# Altium PCB EVQ4242-VE-00B_layout.PcbDoc
Units mil, origin at the board's own origin, x right, y up, seen from the top; angles counter-clockwise.
Board outline 6000 x 4000 mil, 4 copper layers (Top Layer, Mid-Layer 1, Mid-Layer 2, Bottom Layer); 75 components, 28 nets, 229 pads, 356 vias.
Unrouted connection lines stored in the file: 22.
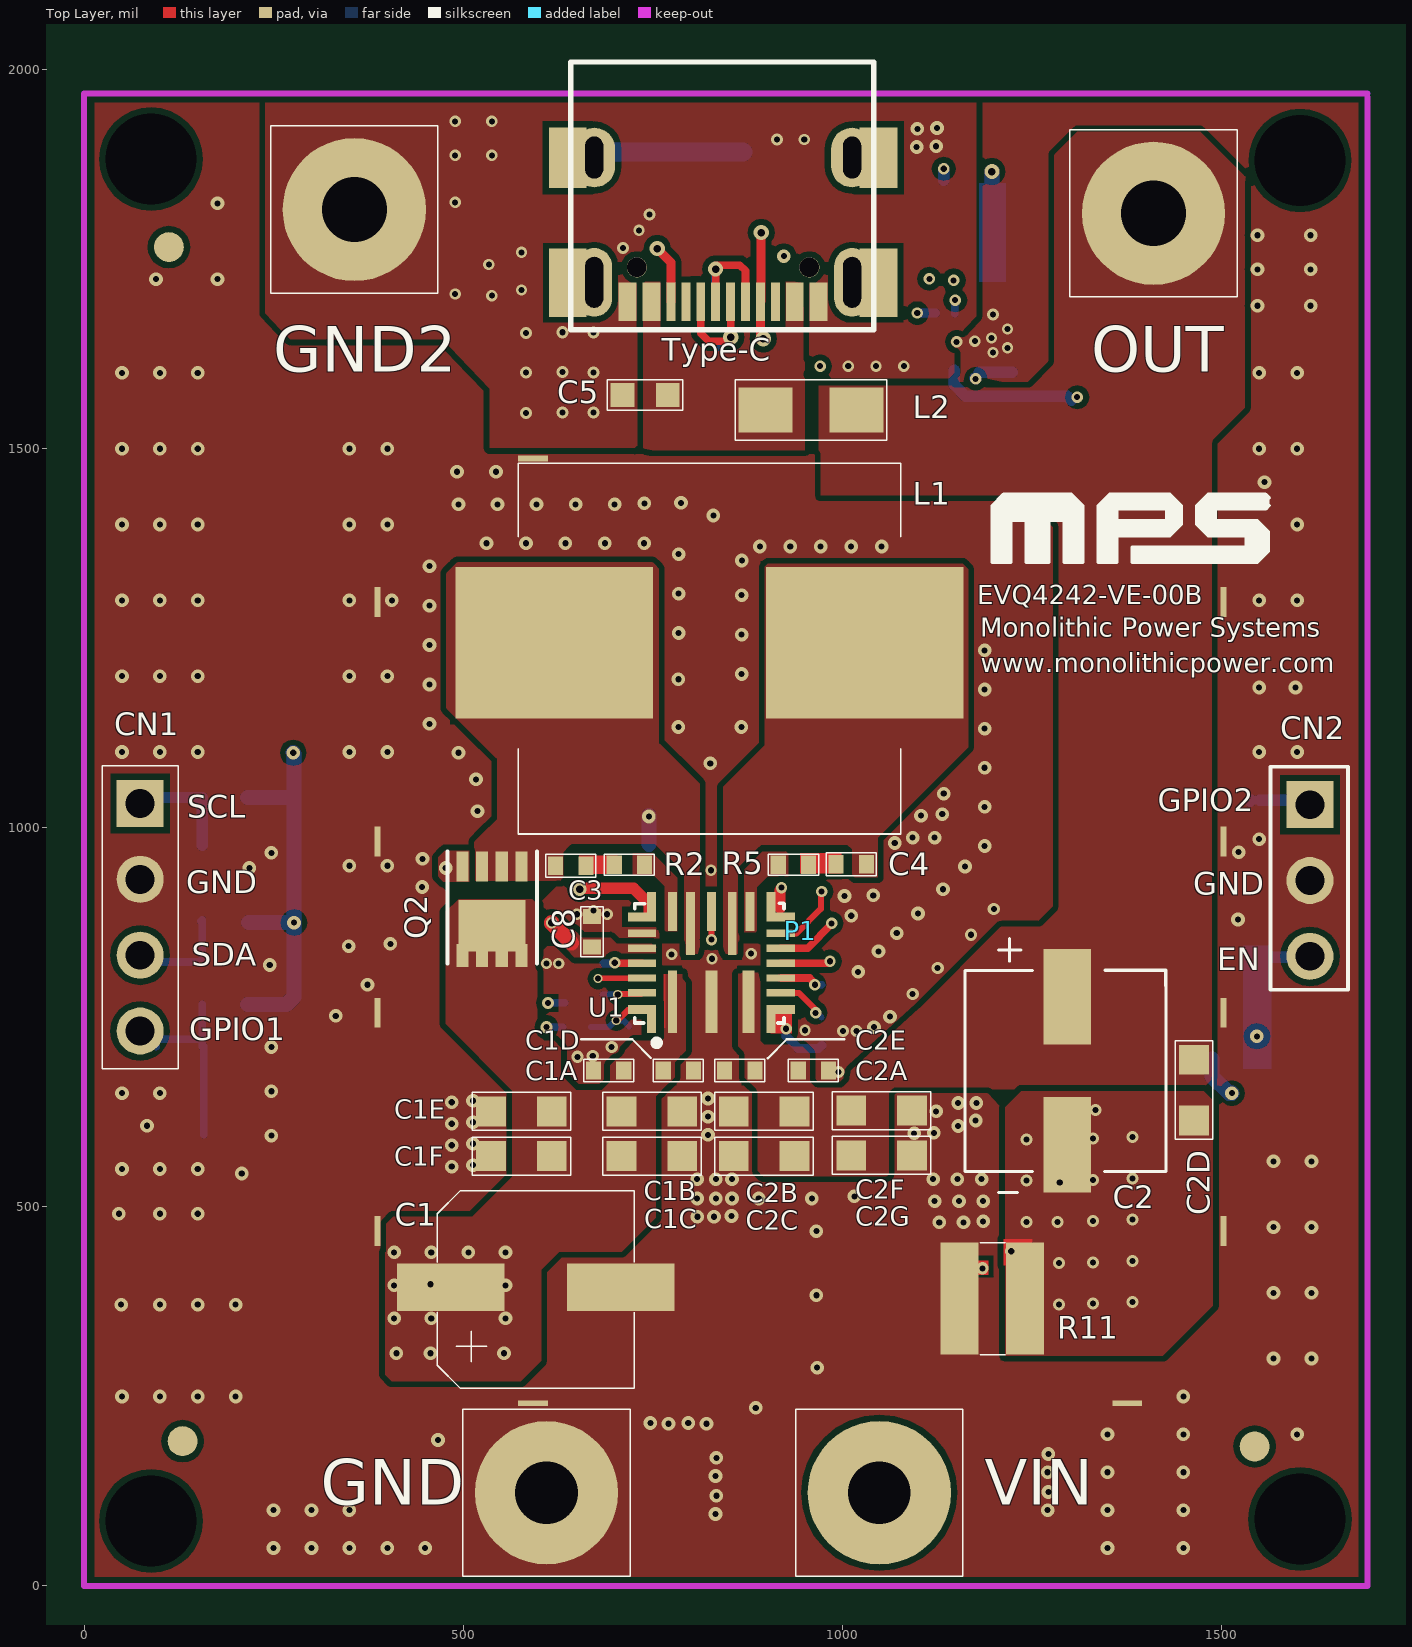
[diagram p0: Top Layer view]
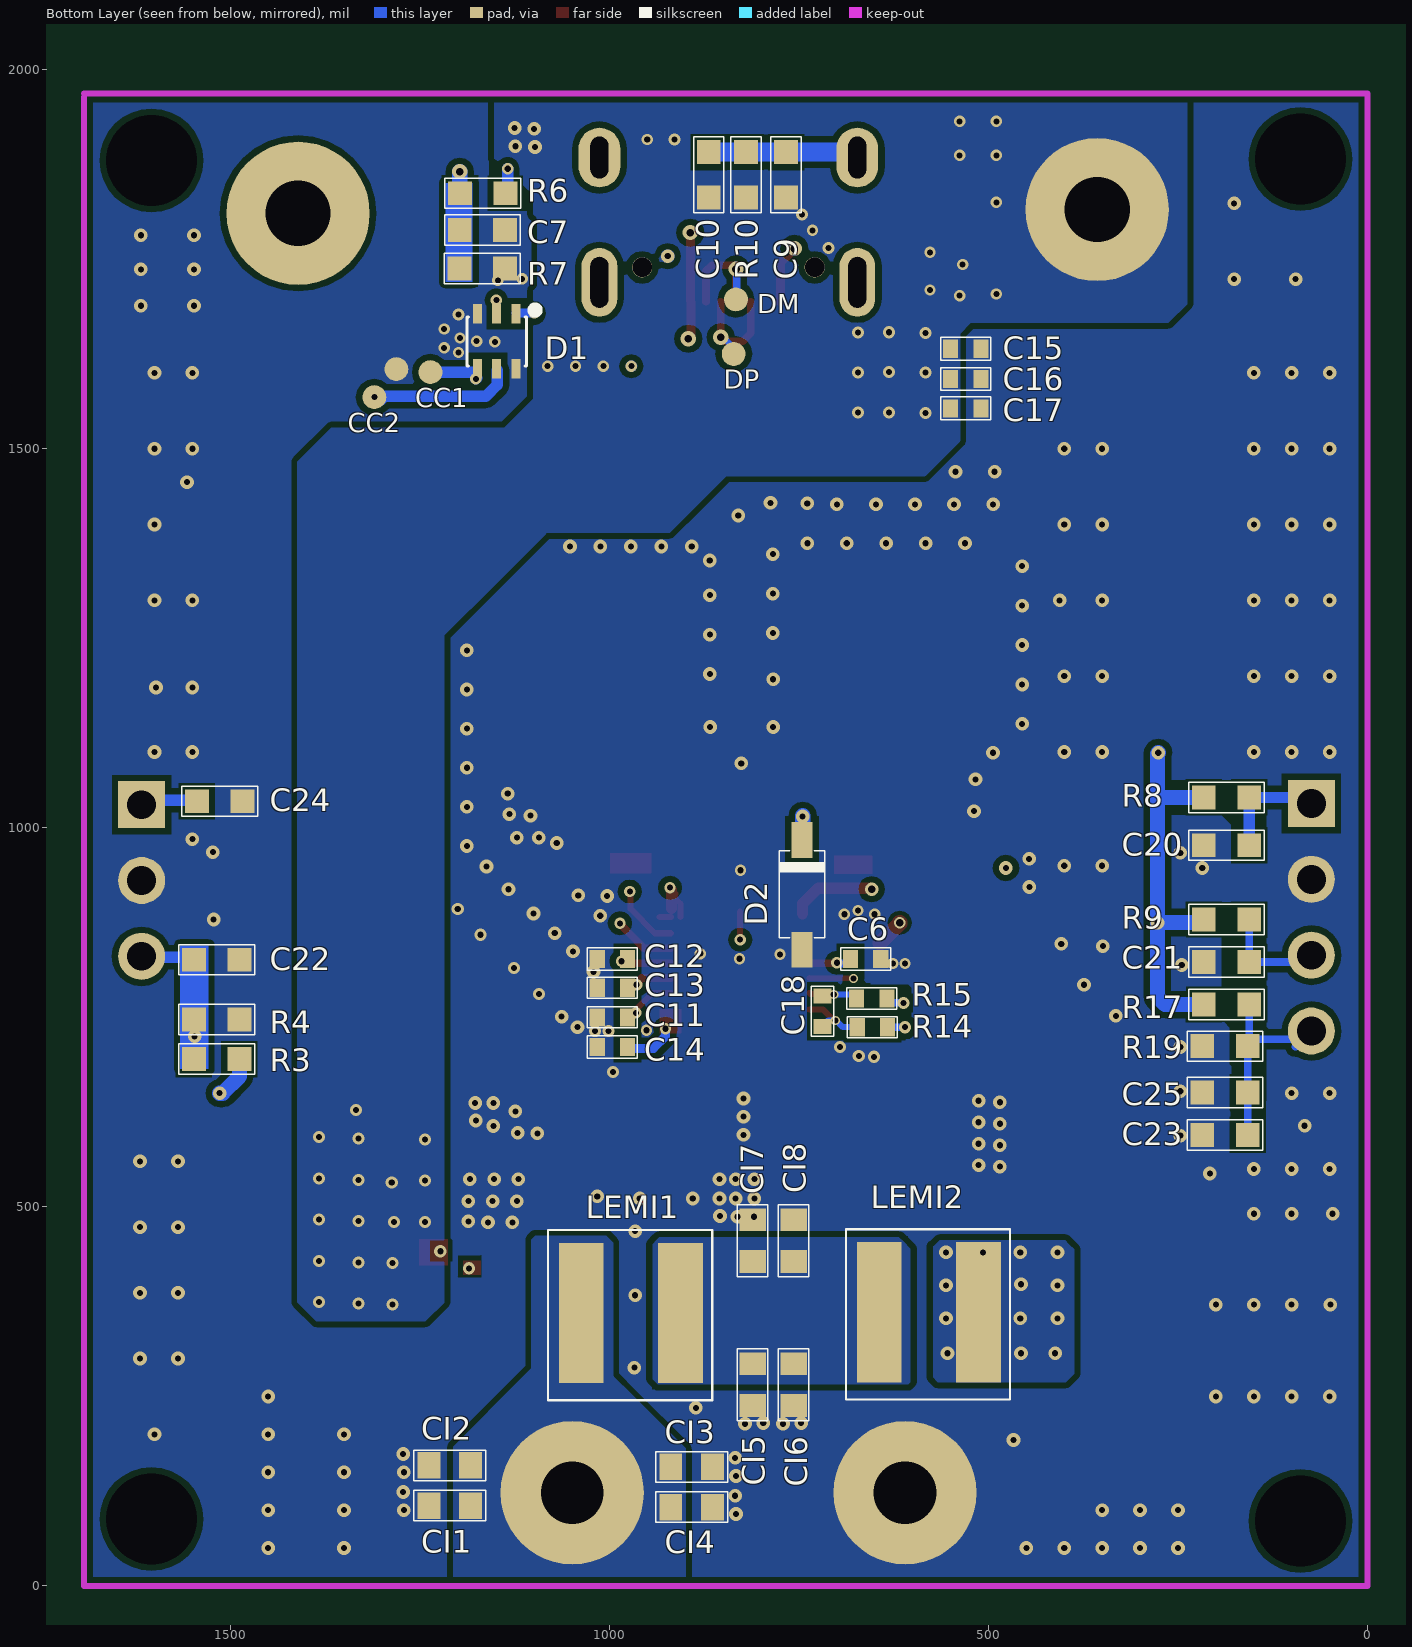
[diagram p1: Bottom Layer view, seen from below]
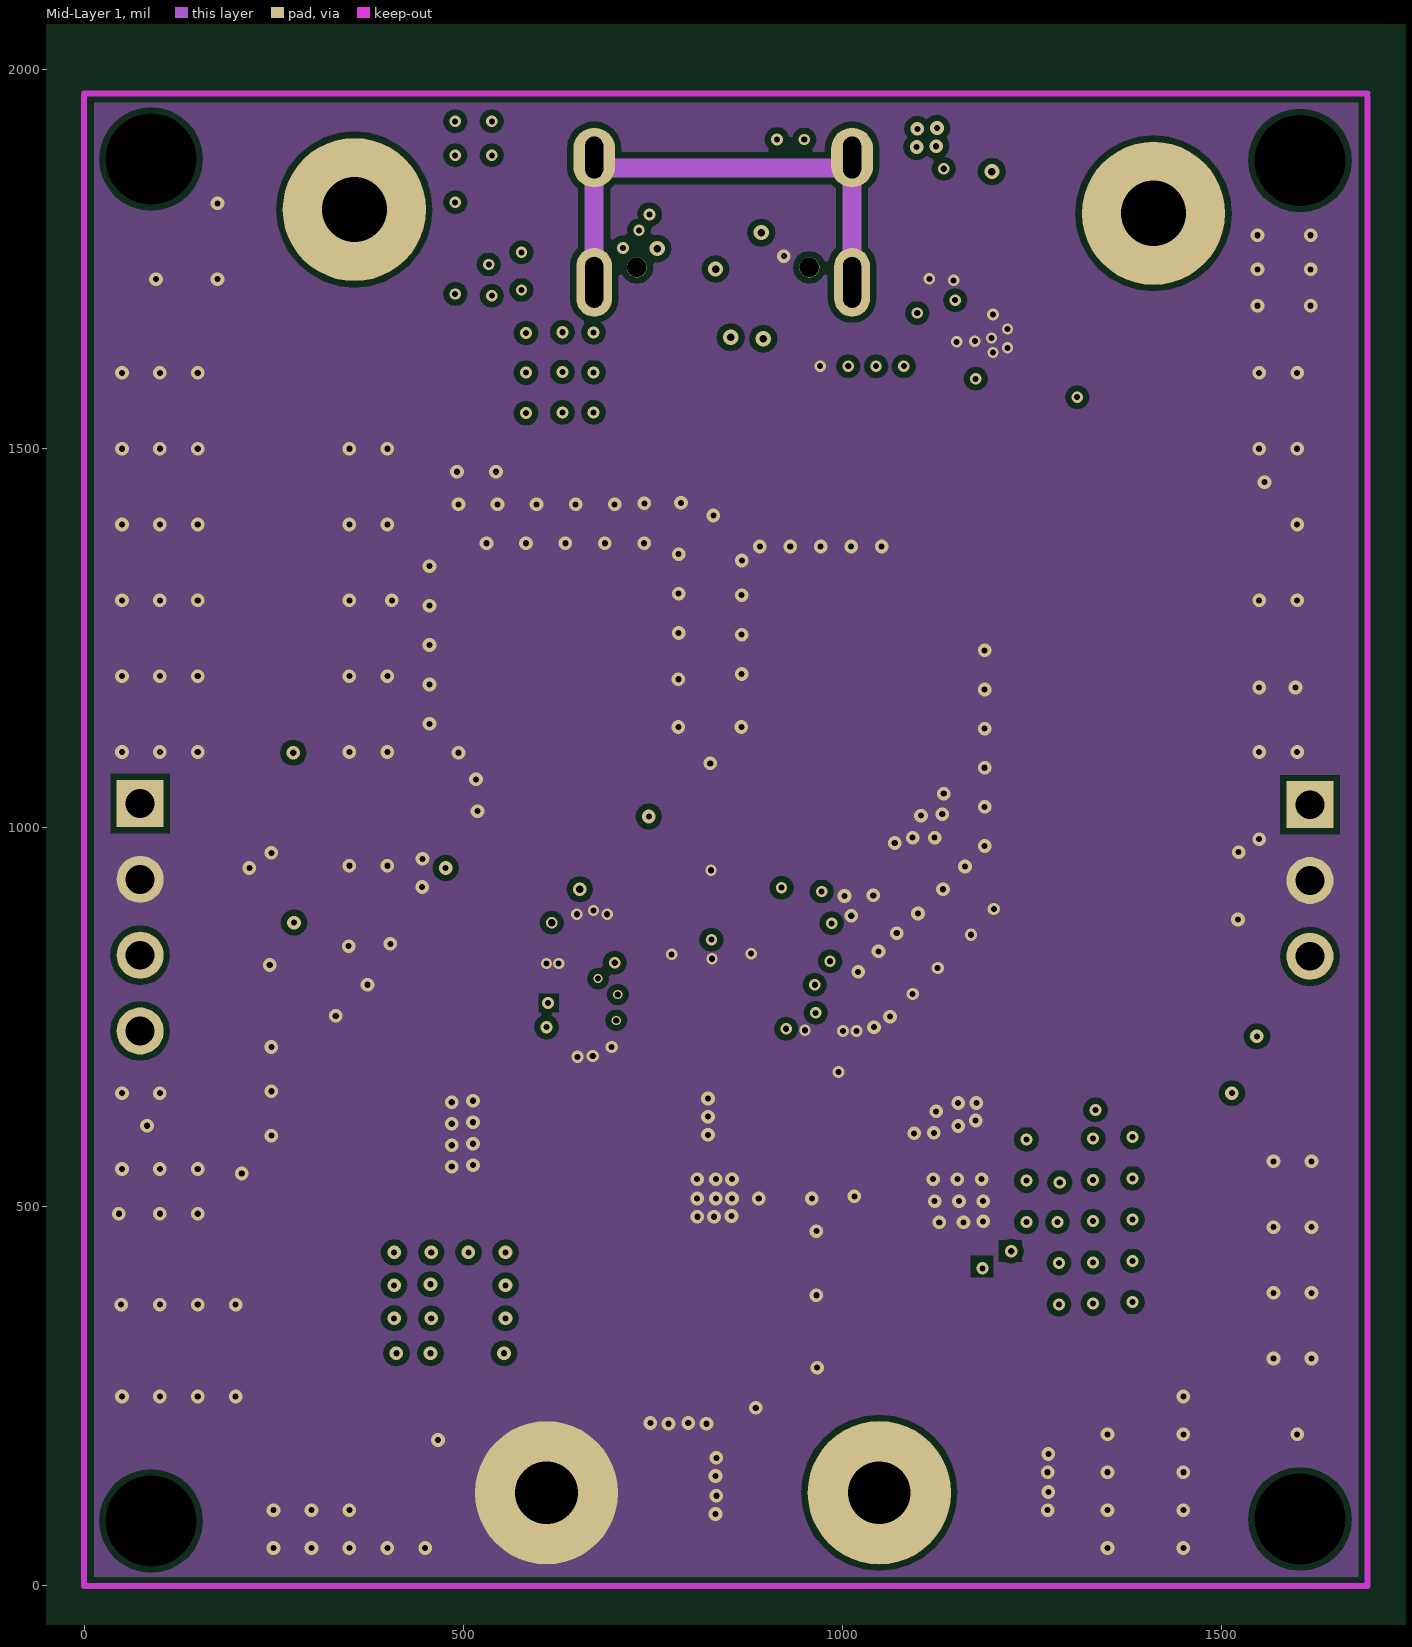
[diagram p2: Mid-Layer 1]
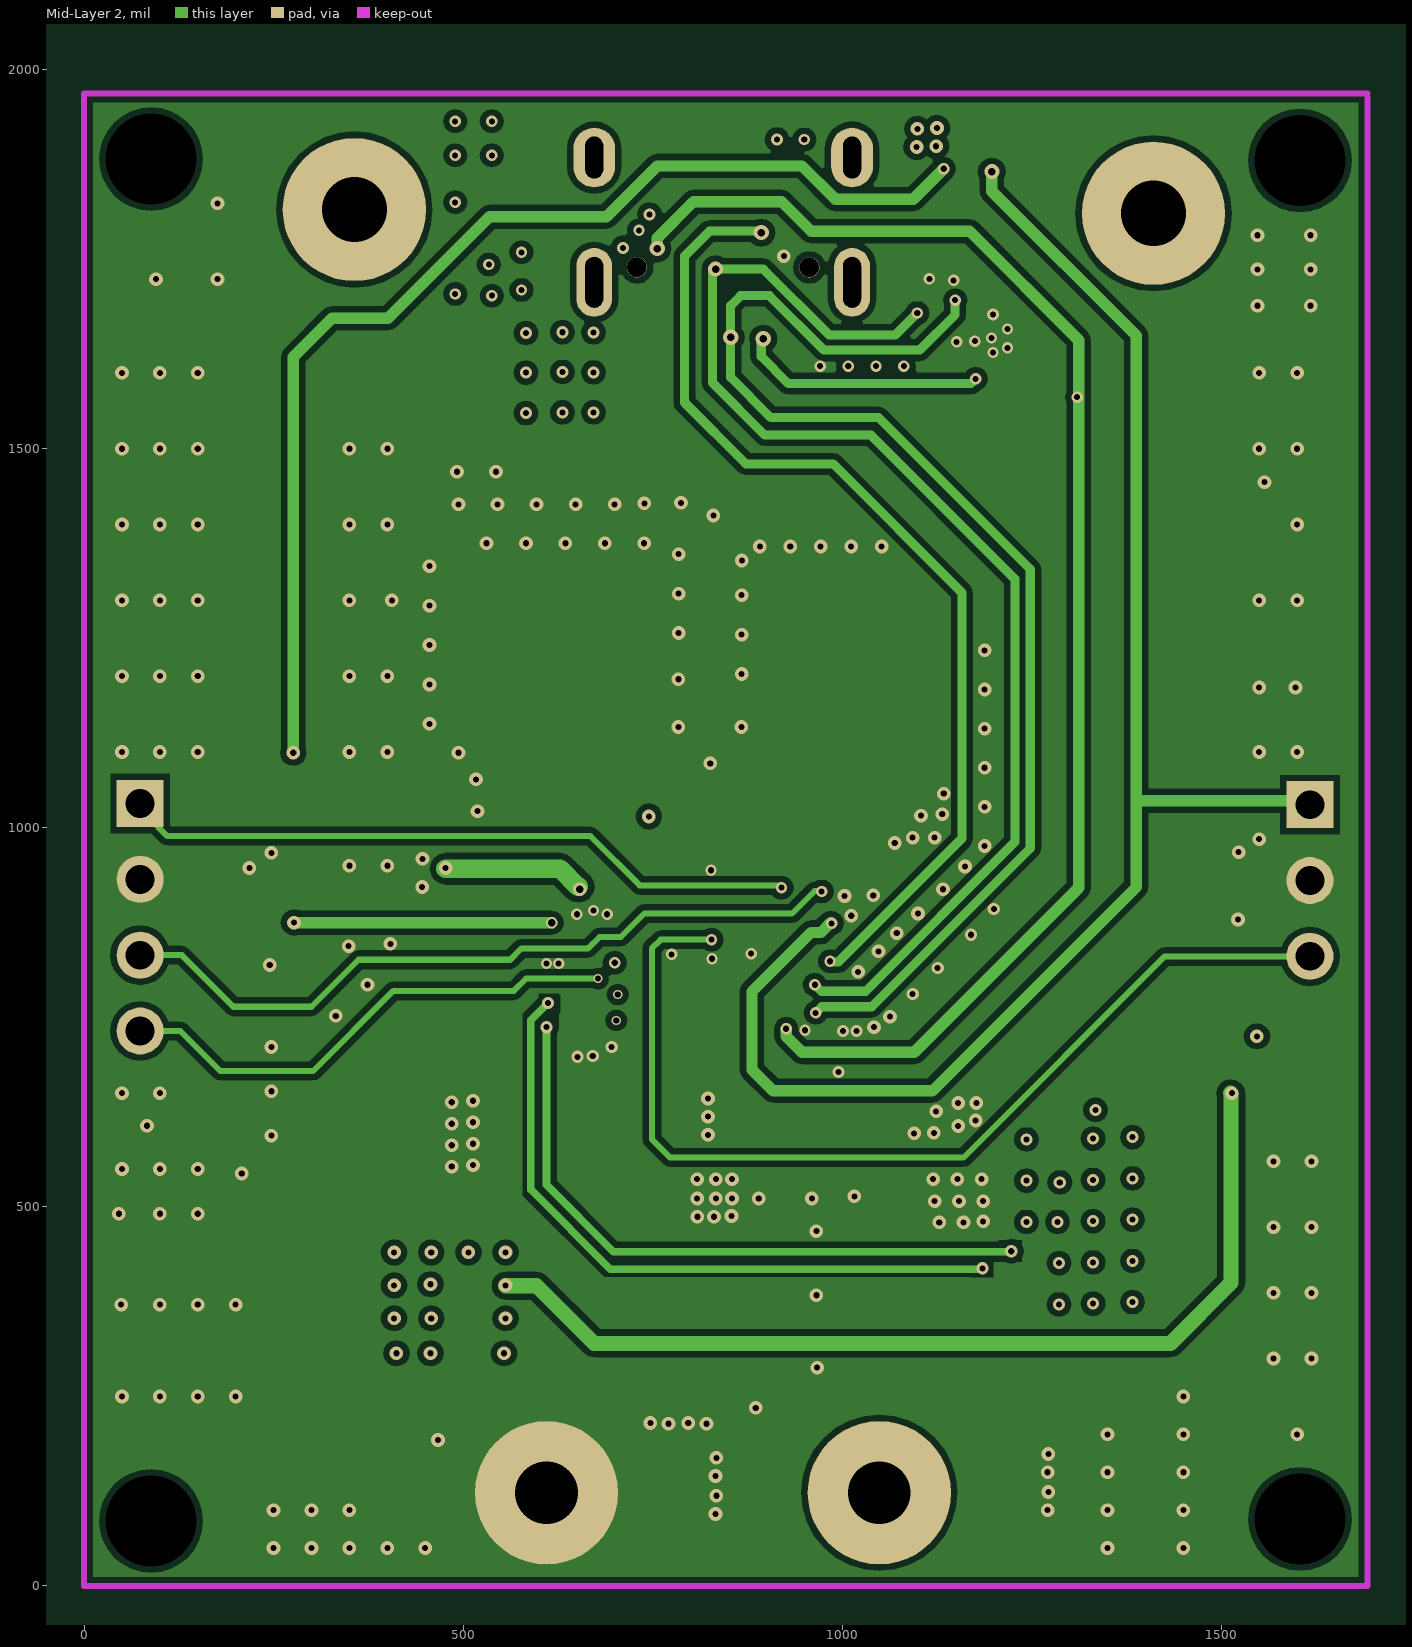
[diagram p3: Mid-Layer 2]

## Layer stack, top to bottom
Top Layer: signal copper 1.4
Dielectric: core 12.6, FR-4, Dk 4.8
Mid-Layer 1: signal copper 1.4
Dielectric: prepreg 12.6, FR-4, Dk 4.8
Mid-Layer 2: signal copper 1.4
Dielectric: core 12.6, FR-4, Dk 4.8
Bottom Layer: signal copper 1.4

## Board outline
-1522.15,-914.62 4477.85,-914.62 4477.85,3085.38 -1522.15,3085.38

## Design rules (kind name [scope] priority, off if disabled: settings)
Clearance [All] p1: gap=5
ComponentClearance [All] p1: gap=0 collisioncheckmode=3 verticalgap=0 showdistances=FALSE
DiffPairsRouting [InNet('DM')] p1: maxlimit=10 minlimit=10 mostfreqgap=10 maxuncoupledlength=500
HoleSize [All] p1: absolutevalues=TRUE maxlimit=200 minlimit=1 maxpercent=80.000 minpercent=20.000
HoleToHoleClearance [All] p1: gap=0 allowstackedmicrovias=TRUE
MinimumSolderMaskSliver [All] p1: minsoldermaskwidth=0
PlaneConnect [All] p1: planeconnectstyle=Direct reliefexpansion=20 reliefentries=4 reliefconductorwidth=10 reliefairgap=10
PolygonConnect [All] p1: connectstyle=Direct reliefconductorwidth=10 reliefentries=4 polygonreliefangle="90 Angle"
RoutingVias [All] p1: holewidth=28 width=50 viastyle="Through Hole" minholewidth=28 minwidth=50 maxholewidth=28 maxwidth=50
SilkToSilkClearance [All] p1: silktosilkclearance=0
SilkscreenOverComponentPads [All] p1: minsilkscreentomaskgap=0
SolderMaskExpansion [All] p1: expansion=4
Width [All] p1: maxlimit=40 minlimit=7 preferedwidth=10
20 further rules are at their usual default settings.

## Components (designator, comment, footprint, x,y, rotation, side; value= is the part's Value field where it differs from the comment)
C1 "CAP/ELECT/DIP/OD5.3P2.0" CAP/ELECT/SMD/C6 484,394 r270 top
C1A "CAP\0603" CAP/0402#1 662,675 r0 top
C1B "CAP\0603" CAP/0805 789,626 r180 top
C1C "" CAP/0805 789,567 r180 top
C1D "CAP\0603" CAP/0402#1 814,685 r180 top
C1E "CAP\0603" CAP/0805 537,626 r0 top
C1F "" CAP/0805 537,567 r0 top
C2 "CAP/ELECT/DIP/OD5.3P2.0" 6.6mm*6.6mm 1292,682 r90 top
C2A "CAP\0603" CAP/0402#1 932,675 r0 top
C2B "CAP\0603" CAP/0805 937,626 r180 top
C2C "CAP\0603" CAP/0805 937,567 r180 top
C2D "CAP\0603" CAP/0805 1464,694 r270 top
C2E "CAP\0603" CAP/0402#1 895,685 r180 top
C2F "CAP\0603" CAP/0805 1012,627 r0 top
C2G "CAP\0603" CAP/0805 1012,568 r0 top
C3 "CAP\0603" CAP/0402#1 612,945 r0 top
C4 "CAP\0603" CAP/0402#1 1042,957 r180 top
C5 "CAP\0603" CAP/0603#1 772,1569 r180 top
C6 "CAP\0603" CAP/0402#1 632,832 r0 bottom
C7 "CAP\0603" CAP/0603#1 1135.4,1786.45 r0 bottom
C8 "CAP\0603" CAP/0402#1 675,833 r90 top
C9 "CAP\0603" CAP/0603#1 764.97,1893.28 r270 bottom
C10 "CAP\0603" CAP/0603#1 866.97,1893.28 r270 bottom
C11 "CAP\0603" CAP/0402#2 1015.98,750 r180 bottom
C12 "CAP\0603" CAP/0402#1 966,832 r0 bottom
C13 "CAP\0603" CAP/0402#2 1015.98,789 r180 bottom
C14 "CAP\0603" CAP/0402#1 966,716 r0 bottom
C15 "Cap" CAP/0402#1 500,1637 r0 bottom
C16 "Cap" CAP/0402#1 500,1596.84 r0 bottom
C17 "Cap" CAP/0402#1 500,1558.26 r0 bottom
C18 "CAP\0603" CAP/0402#1 714,728 r90 bottom
C20 "33pF" CAP0603#1 243,1014 r180 bottom
C21 "33pF" CAP0603#1 243,860 r180 bottom
C22 "33pF" CAP0603#1 1461,789 r0 bottom
C23 "33pF" CAP0603#1 245,632 r180 bottom
C24 "33pF" CAP0603#1 1457,998 r0 bottom
C25 "CAP\0603" CAP/0603#2 236,670 r180 bottom
CI1 "CAP0603" CAP0603#2 1238,106 r180 bottom
CI2 "CAP0603" CAP0603#2 1238,159 r180 bottom
CI3 "CAP0603" CAP0603#2 864,157 r0 bottom
CI4 "CAP0603" CAP0603#2 864,104 r0 bottom
CI5 "CAP0603" CAP0603#2 811,238 r90 bottom
CI6 "CAP0603" CAP0603#2 757,238 r90 bottom
CI7 "CAP0603" CAP0603#2 811,483 r270 bottom
CI8 "CAP0603" CAP0603#2 757,483 r270 bottom
CN1 "HEADER 4" "HEADER 1X4" 109,1022 r270 top
CN2 "AC" CONN/3PIN/2.54MM 1612,1036.5 r270 top
D1 "ESD1L001" ESD0001 1123,1673 r270 bottom
D2 "NS" SOD123 744,880 r90 bottom
GND "CONN/1MM" TP/2MM#1 610,123 r0 top
GND2 "CONN/TP" TP/2MM#2 362,1814 r0 top
L1 "COILCRAFT/LPO2506IB-682" 7443551470 564,1281 r0 top
L2 "L-10X10" sm1206 1019,1551 r180 top
LEMI1 "TDK-2520" L5030 1037,360 r180 bottom
LEMI2 "TDK-2520" L5030 644,361 r180 bottom
OUT "CONN/TP" TP/2MM#2 1416,1809 r0 top
P1 "SHELD" SHELD 627,673 r0 top
Q2 "SQS484EN" SQS484EN 499,949 r270 top
R2 "RES/DIP/1/2W" RES0402 739.4,951.36 r180 top
R3 "RES/DIP/1/2W" RES0603 1387,680 r0 bottom
R4 "RES/DIP/1/2W" RES0603 1387,732 r0 bottom
R5 "RES/DIP/1/2W" RES0402 915.78,951.36 r0 top
R6 "RES/DIP/1/2W" RES0603 1036,1822 r0 bottom
R7 "RES/DIP/1/2W" RES0603 1036.58,1722.67 r0 bottom
R8 "RES/DIP/1/2W" RES0603 55,1025 r0 bottom
R9 "RES/DIP/1/2W" RES0603 55,864 r0 bottom
R10 "RES/DIP/1/2W" RES0603 834.97,1730.28 r90 bottom
R11 "RES/DIP/1/2W" l1508 1198,379 r180 top
R14 "RES/DIP/1/2W" RES0402 633,737 r0 bottom
R15 "RES/DIP/1/2W" RES0402 674,775 r180 bottom
R17 "RES/DIP/1/2W" RES0603 317,782 r180 bottom
R19 "RES/DIP/1/2W" RES0603 319,727 r180 bottom
Type-C "New Type_c" "New Type-C" 833,1789 r180 top locked
U1 "MPQ4242" "QFN-22 (4MM×5MM)" 776.27,770.41 r90 top
VIN "CONN/2MM" TP/2MM#1 1049,123 r0 top

## Footprints (in the part's own frame and the unit in brackets; to place one, negate y for a bottom-side part, rotate by r counter-clockwise, add the part's x,y. Pads: shape width x height; smd on the part's side, far side on the other; paste and mask are expansions set on the pad)
6.6mm*6.6mm [mm] "SMT polymer cap, 150uF, 20V, chemi-con"
  rect 3.2x1.6 smd: 1(2.413,-0.127) 2(-2.54,-0.127)
  silkscreen extent -4.14,-3.43 4.37,3.3
7443551470 [mil]
  rect 260.2x200 smd: 1(56.28,-37) 2(465.72,-37)
  silkscreen extent 9,-289 513,200
CAP0603#1 [mil]
  rect 31.5x31.5 smd: 1(27,-37) 2(87,-37)
  silkscreen extent 7,-57 107,-17
CAP0603#2 [mil]
  rect 30x35 smd paste-2 mask+0: 1(0,0) 2(55,0)
  silkscreen extent -20,-20 75,20, body extent -2,-15 58,15, height 20
CAP/0402#1 [mil]
  rect 20x24 smd: 1(10,5) 2(50,5)
  silkscreen extent -3,-10 63,20
CAP/0402#2 [mil]
  rect 20x24 smd paste+0 mask+3: 1(0,0) 2(40,0)
  silkscreen extent -13,-14 53,14
CAP/0603#1 [mil]
  rect 31.5x31.5 smd: 1(2,-2) 2(62,-2)
  silkscreen extent -18,-22 82,18
CAP/0603#2 [mil]
  rect 31.5x31.5 smd: 1(78,-19) 2(18,-19)
  silkscreen extent -2,-39 98,1
CAP/0805 [mm]
  rect 1x1 smd: 1(0,0) 2(2.032,0)
  silkscreen extent -0.64,-0.63 2.67,0.64
CAP/ELECT/SMD/C6 [mm]
  rect 1.6x3.6 smd: 1(0,0) 2(0,5.69)
  silkscreen extent -3.23,-0.46 3.38,6.15
CONN/3PIN/2.54MM [mil]
  rect 62x62 hole 38: 1(6,5)
  round 62 hole 38: 2(106,5) 3(206,5)
  silkscreen extent -44,-47 250,55
ESD0001 [mm]
  rect 0.66x0.3 smd paste+0.05 mask+0.05: 1(-0.127,0) 2(-0.127,-0.65) 3(-0.127,-1.3) 4(1.713,-1.3) 5(1.713,-0.65) 6(1.713,0)
  silkscreen extent -0.38,-1.65 1.63,0.76
"HEADER 1X4" [mil]
  rect 62x62 hole 38: 1(-10,-35)
  round 62 hole 38: 2(90,-35) 3(190,-35) 4(290,-35)
  silkscreen extent -60,-85 340,15
l1508 [mm]
  rect 1.27x3.75 smd: 1(1.1,0) 2(-1.1,0)
  silkscreen extent -0.43,-1.88 0.41,1.88
L5030 [mm]
  rect 1.5x4.7 smd mask+0.051: 1(0,0) 2(3.327,0)
  silkscreen extent -1.12,-2.92 4.38,2.78
"New Type-C" [mm]
  rect 1.27x2.286 smd mask+0.051: 0(-5.461,1.778) 0(4.953,1.778)
  rect 1.27x2.032 smd mask+0.051: 0(-5.461,-2.413) 0(4.953,-2.413)
  oval 1.4x2 hole 0.6 slot 1.4 at 90 deg mask+0: 0(-4.574,-2.415) 0(4.066,-2.415)
  oval 1.2x2.3 hole 0.6 slot 1.7 at 90 deg mask+0: 0(-4.574,1.765) 0(4.066,1.765)
  round 0.67 hole 0.65 mask+0: 1(-3.144,1.265) 1(2.636,1.265)
  rect 0.3x1.3 smd mask+0.025: A1(-3.604,2.415) A4(-2.804,2.415) A5(-1.504,2.415) A6(-0.504,2.415) A7(-0.004,2.415) A8(0.996,2.415) A9(2.296,2.415) A12(3.096,2.415) B1(2.796,2.415) B4(1.996,2.415) B5(1.496,2.415) B6(0.496,2.415) B7(-1.004,2.415) B8(-2.004,2.415) B9(-2.504,2.415) B12(-3.304,2.415)
  silkscreen extent -5.3,-5.62 4.86,3.36
"QFN-22 (4MM×5MM)" [mm]
  rect 2.1x0.3 smd mask+0.102: 1(0,0)
  rect 2.1x0.4 smd: 2(0,-1.3) 3(0,-2.55)
  rect 0.95x0.3 smd: 4(-0.575,-3.3) 10(3.2,-3.3) 16(3.2,0.7) 22(-0.575,0.7)
  rect 0.3x0.95 smd: 4(-0.25,-3.625) 10(2.85,-3.625) 16(2.85,1.025) 22(-0.25,1.025)
  rect 0.25x0.95 smd: 5(0.3,-3.625) 6(0.8,-3.625) 7(1.3,-3.625) 8(1.8,-3.625) 9(2.3,-3.625) 17(2.3,1.025) 18(1.8,1.025) 19(1.3,1.025) 20(0.8,1.025) 21(0.3,1.025)
  rect 1.3x0.3 smd: 11(3.025,-2.6) 13(3.025,-1.3) 15(3.025,0)
  rect 2.1x0.3 smd: 12(2.625,-2) 14(2.625,-0.6)
  silkscreen extent -1.45,-3.73 3.3,1.27
RES0402 [mil]
  rect 20x24 smd paste-1000: 1(0,0) 2(40,0)
  silkscreen extent -13,-14 53,14
RES0603 [mil]
  rect 31.5x31.5 smd: 1(161,-15) 2(101,-15)
  silkscreen extent 81,-35 181,5
SHELD [mm]
  rect 0.2x1 smd mask+0.025: 1(-6.096,15.875) 2(-6.096,7.849) 3(-6.096,2.108) 4(-6.096,-5.207) 7(22.25,-5.207) 8(22.25,2.108) 9(22.25,7.849) 10(22.25,15.875)
  rect 1x0.2 smd mask+0.025: 5(-0.889,-10.973) 6(19.025,-10.973) 11(-0.889,20.676)
sm1206 [mm]
  rect 1.8x1.5 smd paste-25.4: 1(0,0) 2(3.048,0)
  silkscreen extent -1.02,-1.02 4.06,1.02
SOD123 [mil]
  rect 47x28 smd paste-1000: 1(-41,2) 2(104,2)
  silkscreen extent -25,-28 90,32
SQS484EN [mm] "N-MOSFET"
  rect 1.725x2.235 smd: 0(1.993,0.992)
  rect 0.99x0.405 smd: 1(0,1.98) 2(0,1.32) 3(0,0.66) 4(0,0)
  rect 0.76x0.405 smd: 5(2.985,0) 6(2.985,0.66) 7(2.985,1.32) 8(2.985,1.98)
  silkscreen extent -0.5,-0.5 3.25,2.5
TP/2MM#1 [mm]
  round 4.8 hole 2.1: 1(0,0)
  silkscreen extent -2.8,-2.8 2.8,2.8
TP/2MM#2 [mm]
  round 4.8 hole 2.184: 1(-0.137,0.038)
  silkscreen extent -2.94,-2.76 2.66,2.84

## Part data
C1 C2: library part 07.0271, "Electrolytic Capacitor;50V;Electrolytic;DIP"
C1A C1B C1D C1E C2A C2B C2C C2D C2E C2F C2G C3 C4 C5 C6 C7 C8 C12 C14 C18 C25: library part CAP0603, "CAP0603"
C1C C1F: library part CAP1210, "CAP1210"
C9 C10: library part CAP0603, "Ceramic Cap.,50V,X7R"
C11 C13: library part CAP0603, "Ceramic Cap.,50V,C0G"
C15 C16 C17: "Capacitor"
C20 C21 C22 C23 C24: library part CAP0402, "{Description}"
CI1 CI2 CI3 CI4 CI5 CI6 CI7 CI8 GND2 L2 OUT VIN: "{Description}"
D1: "ESD Diode"
D2: library part "D Schottky", "Schottky Diode"
GND: library part CONN/2MM, "{Description}"
L1: library part TOKO106C, "TOKO106C"
LEMI1 LEMI2: "Inductor, 1.45A, D62LCB"
Q2: library part AM4392N, "AM4392N"
U1: library part "QFN-22 (4MM*5MM)", "Buck-boost converter"

## Free pads (board coordinates)
  round 98.43 hole 120: 0(88.5,85.83) 0(88.5,1881.98)
  round 31.5 smd far side mask+2: 0(833,1697) 1(836,1625) 2(1236,1601) 3(1310,1568)
  round 31.5 smd far side mask+1: 0(1281,1605)
  round 118.11 hole 120: 0(1603.94,88.19) 0(1603.94,1880.31)
  round 39.37 smd mask+2: 1(112,1766) 2(130,191) 3(1544,184)

## Via types
v1: diameter 18, hole 8, Top Layer to Bottom Layer, tented both sides, 252 vias
v2: diameter 15, hole 8, Top Layer to Bottom Layer, tented both sides, 48 vias
v3: diameter 16, hole 8, Top Layer to Bottom Layer, tented both sides, 45 vias
v4: diameter 20, hole 10, Top Layer to Bottom Layer, tented both sides, 6 vias
v5: diameter 12, hole 8, Top Layer to Bottom Layer, tented both sides, 3 vias
v6: diameter 18, hole 10, Top Layer to Bottom Layer, tented both sides, 1 vias
v7: diameter 15, hole 10, Top Layer to Bottom Layer, tented both sides, 1 vias

## Nets (pads, with @x,y where several pads share a name; then routed paths per layer and width w, separated by ;. In a path a pad name is that pad's centre, name@x,y a point inside that pad or via, vN(x,y) a via of type N, cw(c..) or ccw(c..) an arc to the next point about the centre after c; other vN are vias at no path point)
BST1: R2.1 U1.15
BST2: R5.1 U1.11
CC1: C12.1 D1.4 pad.2@1236,1601 Type-C.A5 U1.7 | length 1922.1
  Top Layer w10: U1.7 v2@983.25,821.59
  Top Layer w12: v4(893.21,1785) 892.99,1784.78 892.99,1694.7 Type-C.A5 892.21,1649.79 v4@899,1643
  Mid-Layer 2 w12: v4@893.21,1645 893.21,1621.79 929,1586 1169.86,1586 v2(1175.98,1592.13) ; v4@894,1787 825,1787 792,1754 792,1561 873,1480 988,1480 1158,1310 1158,986 995,823 v2@984,823
  Bottom Layer w15: D1.4@1174.8,1593.31 v2(1175.98,1592.13) ; 1181,1601 pad.2@1224.41,1601
  other v2: 984,824
  other v4: 896,1645
CC2: C14.1 D1.5 pad.3@1310,1568 Type-C.B5 U1.4 | length 2207
  Top Layer w12: v4(756,1764) 774.1,1745.9 Type-C.B5
  Mid-Layer 2 w15: v4(756,1764) 756,1778 804,1826 920,1826 959,1787 1168,1787 1312,1643 1312,921 1095,704 947,704 926,725 v2(926,735)
  Bottom Layer w12: v2(926,735) 926,725 942,709 969,709 C14.1@973,713
  Bottom Layer w15: D1.5@1148,1603.56 1148,1584 1163,1569 1297,1569 pad.3@1302,1564
  other v2: 1310,1568
DM: C13.2 D1.1 pad.0@833,1697 Type-C.A7 Type-C.B7 U1.6 | length 1921.6
  Top Layer w10: Type-C.A7 833.16,1742 865,1742 872.53,1734.47 Type-C.B7 ; U1.6 957.09,801.91 v2@966,793
  Mid-Layer 2 w12: v2(964,793) 972.57,784.43 1030.96,784.43 1228,981.47 1228,1328 1038,1518 898,1518 829,1587 829,1733 v4(833,1737) 895.87,1737 982.87,1650 1070,1650 v2(1099,1679)
  Bottom Layer w10: pad.0@832,1703.38 832,1740.84 v4@833.16,1742 ; v2(964,793) C13.2@972.98,793
  Bottom Layer w12: v2(1099,1679) D1.1@1123,1679
DP: C11.2 D1.2 pad.1@836,1625 Type-C.A6 Type-C.B6 U1.5 | length 1951.7
  Top Layer w8: U1.5 942.78,782.22 965,760 v2(965,756)
  Top Layer w10: Type-C.B6 813.47,1652.53 824,1642 852.84,1642 Type-C.A6
  Mid-Layer 2 w12: v2(965,756) 973,764 1039,764 1248,973 1248,1341 1048,1541 906,1541 852.84,1594.16 852.84,1688.84 866,1702 904,1702 976,1630 1102,1630 1149,1677 v2(1149,1696)
  Bottom Layer w8: pad.1@834.71,1631.74 v4@848.71,1645.74 ; v2(965,756) 966.98,756 C11.2@972.98,750
  Bottom Layer w10: D1.2 v2@1148.59,1697.69
  other v4: 853,1647
EN: C22.2 CN2.3 R3.1 R4.1 U1.13 | length 1457.3
  Top Layer w8: v2@827.45,853.47 U1.13
  Mid-Layer 2 w8: v2(827.59,852.54) 760.54,852.54 749,841 749,722 749,589 773,565 1160,565 1425.5,830.5 CN2.3
  Bottom Layer w8: C22.2@1545,826 C22.2@1548.5,829.5
  Bottom Layer w15: C22.2@1558,829.5 CN2.3@1621,829.5
  Bottom Layer w20: R3.1@1549,710 R4.1@1549,740
  other v1: 1547,725
GND: C1.2 C1A.1 C1B.1 C1C.1 C1D.1 C1E.1 C1F.1 C2A.2 C2B.2 C2C.2 C2E.2 C2F.2 C2G.2 C6.1 C7.1 C8.2 C11.1 C12.2 C13.1 C14.2 C15.1 C16.1 C17.1 C20.1 C21.1 C22.1 C23.1 C24.1 C25.2 CI1.1 CI2.1 CI3.1 CI4.1 CI5.1 CI6.1 CI7.1 CI8.1 CN1.2 CN2.2 D1.3 D1.6 D2.1 GND.1 P1.1 P1.2 P1.3 P1.4 P1.5 P1.6 P1.7 P1.8 P1.9 P1.10 P1.11 pad.0@1281,1605 R4.2 R7.2 R11.1 R15.2 R19.2 U1.2 U1.17 | length 917.4
  Mid-Layer 2 w10: v3(612,769) 589,746 589,523 694,418 1184,418 v3@1185,417
  Bottom Layer w10: v3(612,769) R15.2@634,769
  other v1: 250,50 300,50 350,50 400,50 450,50 1350,50 1450,50 833,95 250,100 300,100 350,100 1271,100 1350,100 1450,100 834,119 1272,124 833,145 1271,150 1350,150 1450,150 834,169 1272,174 466.88,192.62 1350,200 1450,200 1600,200 771,214 821,214 747,215 797,215 886,235 50,250 100,250 150,250 200,250 1450,250 967,288 1569,300 1619,300 49,371 100,371 150,371 200,371 966,383.5 1569,386.67 1619,386.67 966,468 1569,473.33 1619,473.33 1128,479.67 1160,479.67 1186,481 809,487 831,487 854,488 46,491 100,491 150,491 1122,507.67 1154,507.67 1186,507.67 808.66,511 833.46,511 854.72,511 890,511 960,511 1016,514 808.66,536.61 833.46,536.61 854.72,536.61 1120,536.67 1152,536.67 1184,536.67 208,544 50,550 100,550 150,550 485,553 513,555 1569,560 1619,560 485,581.33 513,583.33 247,594 823,595 1095,597 1121,597.67 1153,606.67 83,607 485,609.67 513,611.67 1176,614 823,619 1124,626 1153,637 1177,637 485,638 513,640 823,643 50,650 100,650 247,652.5 247,711 1042,737 1063,751 332,752 374,793 1021,810 245,819 1048,837 349,844 404,847 1072,861 1522,879 1012,884 1100,887 1003,910 1041,911 1133,919 446,922 218,947 1162,949 350,950 400,950 446.38,959 247,967 1523,968 1188,976 1069.38,980 1550,985 1093,987 1122,987 1104,1016 1132,1018 519,1022 1188,1027.6 1134,1045 517,1064 1188,1079.2 826,1085 494,1099 50,1100 100,1100 150,1100 350,1100 400,1100 1550,1100 1600,1100 1188,1130.8 784,1133 867,1133 455.62,1137.12 1188,1182.4 1550,1185 1598,1185 455.62,1189.12 784,1196 50,1200 100,1200 150,1200 350,1200 400,1200 867.38,1202.88 1188,1234 455.62,1241.12 867.38,1254.88 784.38,1256.88 455.62,1293.12 50,1300 100,1300 150,1300 350,1300 406,1300 1550,1300 1600,1300 867.38,1306.88 784.38,1308.88 455.62,1345.12 867.6,1352.5 784.38,1360.88 891.34,1371 931.5,1371 971.67,1371 1011.83,1371 1052,1371 530.88,1375.38 582.88,1375.38 634.88,1375.38 686.88,1375.38 738.88,1375.38 50,1400 100,1400 150,1400 350,1400 400,1400 1600,1400 830,1412 493.88,1426.62 545.38,1426.62 596.88,1426.62 648.38,1426.62 699.88,1426.62 739,1428 787.38,1428.62 1557,1456 491.88,1469.62 543.38,1469.62 50,1500 100,1500 150,1500 350,1500 400,1500 1550,1500 1600,1500 50,1600 100,1600 150,1600 1550,1600 1600,1600 1547.88,1688.62 1617.94,1688.62 94.88,1723.62 176,1723.62 1547.88,1736.62 1617.94,1736.62 923,1754 1547.88,1781.62 1617.94,1781.62 176,1823.62
  other v2: 951,733 610,821 626,821 828.38,827.35 775,833 880,834 650,886 690,886 672,891 827,944 971,1609 1199,1627 1218,1633 1151,1641 1175,1642 1197,1646 1218,1658 1147,1722 1115,1724
  other v3: 1185,419 995,678 651,698 671,699 696,711 1001,732 1019,732 1093,781 1126,815 1170,859 1200,893 1199,1677
GND2: C2.2 C2D.2 C5.2 C9.2 C10.2 C15.2 C16.2 C17.2 GND2.1 R10.2 R11.2 R14.1 Type-C.A1 Type-C.A12 Type-C.B1 Type-C.B12 | length 879.3
  Mid-Layer 2 w10: v3(610,737) 610,529 698,441 1221.5,441 v3@1223,439.5
  Bottom Layer w10: v3(610,737) R14.1@631.21,737
  other v1: 1098.16,1898 1124,1899 1099.16,1922 1125,1923
  other v2: 1008,1609 1044.67,1609 1081.33,1609 538,1702 489.54,1704.18 577,1709.39 534,1743 577,1759 732,1788 489.54,1825 489.54,1887 538,1887 950,1907.84 489.54,1931.88 538,1931.88
  other v3: 1286,371.4 1331,372.4 1383,374.4 1286,425.8 1331,426.8 1383,428.8 1223,441.5 1243,480.2 1284,480.2 1331,481.2 1383,483.2 1287,532.31 1243,534.6 1331,535.6 1383,537.6 1243,589 1331,590 1383,592 1334,628 583,1547 631,1548 672,1548 583,1600.33 672,1600.67 631,1601.33 583,1652.67 631,1653.67 672,1653.33 711,1765 746,1809 914,1908
GPIO1: C23.2 C25.1 CN1.4 R17.1 R19.1 U1.20 | length 998.1
  Top Layer w8: v5(678,801) U1.20
  Mid-Layer 2 w8: CN1.4 127,732 180,679 302,679 408,785 567,785 583,801 v5(678,801)
  Bottom Layer w10: CN1.4 CN1.4@95,711 ; CN1.4@96,721 R19.1@157,721 ; R19.1@156,711 R17.1 ; C23.2 R19.1
GPIO2: C7.2 C24.2 CN2.1 R6.1 R7.1 U1.8 | length 2316.9
  Top Layer w10: U1.8 954.28,841.28 v2@986.5,873.5
  Mid-Layer 2 w15: v2@985,875 972,862 959,862 881,784 881,681 909,653 1119,653 1388,922 1388,1649 1197.4,1839.6 v4@1197.4,1865 ; 1390.5,1035.5 CN2.1@1619,1035.5
  Bottom Layer w8: R6.1@1200.39,1831.09 R6.1@1205.12,1826.36
  Bottom Layer w15: C24.2@1538,1035 C24.2@1539.5,1036.5 ; C24.2@1551,1036.5 CN2.1@1617,1036.5
  Bottom Layer w20: R6.1@1197.4,1833.45 v4(1197.4,1865.6)
  Bottom Layer w25: C7.2@1197.67,1784.2 C7.2@1200.43,1786.96
  other v2: 986,874
HS_G: Q2.4 U1.16 | length 295.8
  Top Layer w15: v6@656.26,920.26 724.84,920.26 745.31,899.8 U1.16@745.31,886.8
  Mid-Layer 2 w25: v1@477,946 628,946 651.5,922.5 v6@652.5,922.5
  other v1: 477,947
  other v6: 654,919
ICOMP: C6.2 U1.19 | length 49.9
  Top Layer w10: v2@700,821.59 U1.19
  Bottom Layer w10: C6.2@685,821 v2@699,821
  other v2: 700,822
ISENSE+: C18.1 R14.2 U1.22 | length 97
  Top Layer w8: v5@701.5,746.5 704.5,746.5 718.57,760.57 U1.22@735.91,760.57
  Bottom Layer w8: R14.2@669,737 R14.2 692,737 v5@701.5,746.5 ; v5(702,746) 711,746 C18.1
ISENSE-: C18.2 R15.1 U1.21 | length 52.4
  Top Layer w8: v5@704,781 734.69,781 U1.21
  Bottom Layer w8: 684,780 v5(704,780)
NetC3_2: C3.2 R2.2
NetC4_2: C4.2 R5.2
OUT: C2.1 C2A.1 C2B.1 C2C.1 C2D.1 C2E.1 C2F.1 C2G.1 L2.1 OUT.1 U1.3
OUT1: C5.1 L2.2 Type-C.A4 Type-C.A9 Type-C.B4 Type-C.B9
SCL: C20.2 CN1.1 R8.2 U1.10 | length 1120.3
  Top Layer w8: U1.10@906.19,882.19 906.19,896.39 906.19,900.19 916,910 ; 913.05,913.05 v2@918,918 ; U1.10@918.98,882.61 U1.10@933.61,882.61
  Top Layer w15: 918,894 v2@918,918
  Mid-Layer 2 w8: CN1.1@70,1030 86,1014 86,1013 110,989 668,989 733,924 v2@920,924
  Bottom Layer w15: CN1.1 82,1040 R8.2 C20.2
  other v2: 920,921
SDA: C21.2 CN1.3 R9.2 U1.9 | length 1234
  Top Layer w8: U1.9 939.96,860.96 972,893 v2@972,916
  Mid-Layer 2 w8: CN1.3 129,832 197,764 300,764 362,826 562,826 577,841 665,841 680,856 708,856 739,887 934,887 963.5,916.5 v2@971.5,916.5 ; CN1.3@83,827 CN1.3@89,821
  Bottom Layer w10: CN1.3 CN1.3@85,843 ; CN1.3@83,823 C21.2 R9.2 R9.2@154,877
  other v2: 973,916
SHIELD: C9.1 C10.1 R10.1 Type-C.0 | length 870.9
  Mid-Layer 1 w25: Type-C.0@672.92,1719.51 672.92,1884.08 687,1870 999,1870 1013.08,1884.08 Type-C.0@1013.08,1719.51
  Bottom Layer w25: Type-C.0@679,1891.28 C9.1 R10.1 C10.1
SW1: C3.1 D2.2 L1.1 Q2.1 Q2.2 Q2.3 U1.14 | length 38
  Bottom Layer w20: D2.2@745,978 v1@745,1016
  other v1: 745,1015
SW2: C4.1 L1.2 U1.12
VCC: C8.1 R6.2 R8.1 R9.1 R17.2 U1.18 | length 2421
  Top Layer w20: v7(617,875) 617,874 643,848
  Mid-Layer 2 w15: v1(276,1099) 276,1621 327,1672 401,1672 535,1806 689,1806 756,1873 947,1873 991,1829 1093.67,1829 v2(1134,1869.33) ; v1(277,875) v7(617,875)
  Bottom Layer w15: 1134,1854 v2(1134,1869.33)
  Bottom Layer w20: R17.2 267,767 277,777 v1(277,875) ; R8.1 277,1040 ; R9.1@217,875 v1(277,875) ; v1(276,1099) 277,1098 277,1040 ; v1(277,875) 277,1040
VEM2: CI5.2 CI6.2 CI7.2 CI8.2 LEMI1.2 LEMI2.1
VEMI: CI1.2 CI2.2 CI3.2 CI4.2 LEMI1.1 VIN.1
VIN: C1.1 C1A.2 C1B.2 C1C.2 C1D.2 C1E.2 C1F.2 LEMI2.2 Q2.0 Q2.5 Q2.6 Q2.7 Q2.8 R3.2 U1.1 | length 1330.1
  Mid-Layer 2 w20: v1@556,396 597,396 673,320 1433,320 1513,400 1513,649 v1@1512,650
  Bottom Layer w20: R3.2 1488,672 1510,650 v1(1514,650)
  other v1: 412,307 457,307 554,307 409,353 458,353 556,353 409,396.5 556,396.5 457,398 409,440 458,440 507,440 556,440
pads on no net: Type-C.1 Type-C.A8 Type-C.B8

## Polygon pours and split planes (outlines as drawn)
SW2 on Top Layer "Bottom Layer-No Net 1" (solid, pour order 34): 843,834 843,1054 898.03,1109.03 898.03,1344.03 902,1348 1159,1348 1166,1341 1166,1106 1047,987 1047,935 1016.86,935 1013.39,938.47 1013.39,971.61 1007,978 894,978 864,948 864,832 845,832 844,833
GND on Top Layer "Bottom Layer-No Net 1" (solid, pour order 44): 759.5,847.52 760,846.93 760,817.49 785.69,817.49 791,811.23 799.69,801 825,801 847.52,801 857,812.16 862.52,818.67 896,818.67 896,852.82 895,854 889,846.93 761.5,846.93
HS_G on Top Layer "Bottom Layer-No Net 1" (solid, pour order 42): 508,970 490,970 476,970 473,967 467,961 467,947 467,936 470,933 474,929 508,929 508,965.07 514.97,972.05
GND on Top Layer "Bottom Layer-No Net 1" (solid, pour order 33): 754.97,851.13 708.97,851.13 704.97,855.13 700.97,859.13 682.97,859.13 661.97,859.13 654.97,866.13 648.97,872.13 637.97,872.13 637.97,898.13 638.97,899.13 642.97,903.13 652.97,903.13 690.97,903.13 695.97,898.13 708.97,885.13 708.97,880.13 708.97,876.13 713.97,871.13 715.97,869.13 729.97,869.13 753.97,869.13 754.97,868.13 754.97,851.13
VCC on Top Layer "Bottom Layer-No Net 1" (solid, pour order 31): 755,833 729.4,833 689.45,833 686.38,830 685.35,829 666.92,829 647.46,829 637.22,839 628,848 628,862 628,863 630.05,865 631.07,866 642.34,866 645.41,866 651.56,860 656.68,855 674.09,855 694.57,855 702.77,847 730.42,847 753.98,847 755,846 755,834
BST1 on Top Layer "Top Layer-No Net 1" (solid, pour order 29): 724.05,970.26 758.3,969.87 782.71,945.46 782.71,863.57 767.35,863.57 765.78,865.14 765.78,923.02 751.61,937.19 724.05,937.19
BST2 on Top Layer "Top Layer-No Net 1" (solid, pour order 30): 929.17,969.08 894.91,968.68 870.5,944.28 870.5,862.39 885.86,862.39 887.43,863.96 887.43,921.83 901.61,936.01 929.17,936.01
GND2 on Top Layer "Bottom Layer-No Net 1" (solid, remove dead copper, pour order 24): 240.99,1966 239,1963.91 239,1787.63 239,1678.84 258.94,1657.92 271.89,1644.32 344.66,1644.32 473.25,1644.32 495.18,1621.3 535.05,1579.46 535.05,1501 726.44,1501 728.44,1503.09 729.43,1504.14 729.43,1694.53 956.71,1694.53 956.84,1694.39 956.84,1673.04 956.84,1601.28 961.69,1596.2 964.68,1593.06 980.63,1593.06 1141.12,1593.06 1145.11,1597.24 1148.1,1600.38 1148.1,1633.86 1148.1,1644.32 1163.05,1660.01 1177,1674.65 1177,1711.27 1177,1963.38 1178,1964.43 1177,1965.47 239,1965.47
OUT1 on Top Layer "Bottom Layer-No Net 1" (solid, remove dead copper, pour order 28): 737.5,1720.16 737.5,1500 739.5,1498 783.5,1498 950.5,1498 950.5,1534 950.5,1719.08 949.4,1720.18 949.38,1720.16 737.5,1720.16
SW1 on Top Layer "Bottom Layer-No Net 1" (solid, pour order 39): 812,834 812,977.67 812,1058.25 781,1089.02 758,1111.84 758,1298.4 758,1342.06 754,1346.03 750,1350 734,1350 492,1350 485,1343.05 478,1336.11 478,1312.29 478,1157.49 509,1126.72 545,1091 545,1041.38 545,1011.61 524,990.77 515,981.84 515,946.12 515,931.23 516,930.24 629,930.24 629,931.23 632,934.21 632,963.98 632,967.95 639,974.9 643,978.87 726,978.87 753,978.87 785,947.11 791.41,940.75 791.41,832 811,832
GND on Top Layer "Bottom Layer-No Net 1" (solid, remove dead copper, pour order 27): 10.87,1962.45 13.87,1959.45 13.87,-5.55 1695.87,-5.55 1695.87,1965.95 17.87,1965.95
GND2 on Top Layer "Bottom Layer-No Net 1" (solid, pour order 37): 1216,303.67 1423,303.67 1456,336.67 1489,369.67 1489,636.67 1489,640.67 1481,648.67 1477,652.67 1242,652.67 1236,652.67 1223,639.67 1215,631.67 1215,302.67
VIN on Top Layer "Bottom Layer-No Net 1" (solid, pour order 43): 765.57,807 766,806.57 766,736
VIN on Top Layer "Bottom Layer-No Net 1" (solid, pour order 45): 765.57,807 765.57,722.57 762,719 726,719 694,687 694,665 683,654 649,654 629,674 629,710 620,719 607,719 598,728 598,899 591,906 494,906 477,889 477,741.37 565,653.37 565,540 512,487 408,487 397,476 397,278.78 405.78,270 576,270 603,297 603,417 627,441 709,441 754,486 754,646 779,671 779,691 794,706 794,805 792,807
OUT on Top Layer "Bottom Layer-No Net 1" (solid, pour order 46): 860,810 860,711 869,702 869,669 886,652 886,546 894,538 1060,538 1064,542 1064,650 1069,655 1474,655 1490,671 1490,1509 1534,1553 1534,1860 1473,1921 1309,1921 1277,1889 1277,1613 1247,1583 969,1583 969,1436 1246,1436 1283,1399 1283,894 1261,872 1208,872 1100,764 1010,682 1002.39,681.06 1008,669 999,660 966,660 960,666 960,703 949,714 897,714 892,719 892,810
GND2 on Bottom Layer "Bottom Layer-No Net 1" (solid, pour order 32): 1411.5,374 1411.5,1483 1366.5,1528 1138.5,1528 1100.5,1566 1100.5,1835 1115.5,1850 1151,1850 1152,1859 1152,1968.5 1146,1972 1161.5,1971 237.5,1971 237.5,1691 262.5,1666 523.5,1666 537.5,1652 537.5,1510 583.5,1464 845.5,1464 920.5,1389 1082.5,1389 1217.5,1254 1217.5,374 1242.5,349 1386.5,349
GND on Bottom Layer "Top Layer-No Net 1" (solid, pour order 26): 1163.75,1718.42 1163.35,1718.8 1163.35,1775.45 1163.35,1802.84 1162.57,1803.59 1140.52,1803.59 1106.27,1803.59 1105.48,1802.84 1103.12,1800.59 1103.12,1766.82 1103.12,1717.3 1103.51,1716.92 1104.69,1715.8 1133.04,1715.8 1161.39,1715.8 1162.57,1716.92
GND on Bottom Layer "Top Layer-No Net 1" (solid, remove dead copper, pour order 36): 8,1959 8,7 11,4 19,-4 1691,-4 1691,1956 1694,1959 1689,1964 8,1964
VIN on Bottom Layer "Bottom Layer-No Net 1" (solid, pour order 25): 573,448 573,373 573,275 568,270 567,269 529,269 398,269 391,276 387,280 387,363 387,444 394,451 399,456 446,456 564,456 572,448
VEM2 on Bottom Layer "Bottom Layer-No Net 1" (solid, pour order 38): 606,266 936,266 939,269 943,273 943,324 943,451 938,456 934,460 788,460 618,460 612,454 603,445 603,293 603,269 606,266
VEMI on Bottom Layer "Bottom Layer-No Net 1" (solid, pour order 41): 1004,462 995,453 995,381 995,277 972,254 899,181 899,83 899,1 900,0 1204,0 1205,1 1206,2 1206,120 1206,184 1114,276 1103,287 1103,392 1103,457 1098,462 1004,462
GND on Mid-Layer 1 "Top Layer-No Net 1" (solid, remove dead copper, pour order 35): 13.76,1969.08 13.76,7.19 10.76,4.19 25.76,-10.81 1697.76,-10.81 1697.76,1963.08 1691.76,1969.08 16.76,1969.08
GND on Mid-Layer 2 "Top Layer-No Net 1" (solid, remove dead copper, pour order 40): 5.38,1968.38 5.38,15.38 2.38,12.38 4.38,10.38 1689.38,10.38 1689.38,1966.38 1687.38,1968.38 7.38,1968.38

## Keep-outs
Keep-Out Layer:
  lines w7.87: 1692.91,1964.17 1692.91,0 0,0 0,1968.5 1692.91,1968.5

## Other copper
Top Layer:
  rectangle net GND2: 1213,423 1251,457.67
  rectangle net GND: 1169.26,410 1193,429
  rectangle net NetC4_2: 944.52,939.94 998.85,966.72
  rectangle net NetC3_2: 653.18,938.76 703.57,963.17
  rectangle net CC2: 905.15,729 934,760.81
  pour cut-out: 892,856 892,813 898,813 898,854 896,856
  pour cut-out: 758.64,868.72 759,868.36 759,841 760,840 758,813 763,815 763,869 764,870 759,870 759,868
  pour cut-out: 698.46,929.81 721.02,929.81 721.2,929.62 723.46,931.87 723.46,966.91 698.65,966.91 701.61,963.96 701.61,932.96
  pour cut-out: 600.7,900.14 629,928.44 629,930.24 468.24,930.24 466,928 477,917 477,895 491,909 590,909 601,898
  pour cut-out: 950.5,1492.59 950.68,1492.41 964.59,1492.41 964.59,1588.59 965,1589 953,1589 953,1495.09
  pour cut-out: 726.44,1491.59 727.44,1492.59 742.41,1492.59 736,1499 732,1495 725,1495
  pour cut-out: 627,925 640,925 641,924 649,932 649,964 656,971 651,976 642,976 635,969 635,934 627,926
  pour cut-out: 624.54,844.11 624.43,844 611,844 601,834 601,868 603,868 625,846 625,845
  pour cut-out: 1210.59,629 1210.59,629.41 1189,653 1221,653 1225,645 1225,643 1211,629
  pour cut-out: 1494.41,671 1495,670.41 1495,649 1493,649 1482,660 1492,670 1493,670
Mid-Layer 2:
  pour cut-out: 602,780 602,778 579,755 579,515 686,408 1142,408 1187,407 1187,420 1174,427 1098.32,427.32 1098,427 697,427 598,526 598,742 612,756 628,756 628,780
  pour cut-out: 628,756.09 626.1,754.19 626.1,735.91 623.09,735.91 606,753 612,759 612,760 623,760 627,756
Bottom Layer:
  region net GPIO2: 1216.14,1850.77 1180.71,1850.77 1180.71,1719.67 1216.14,1719.67
  rectangle net EN: 1529,682 1566,845
  pour cut-out: 238.75,901.75 133.25,901.75 134.25,571.25 181.75,571.25 178.75,688.25 178.75,733.75 189.25,744.25 238.75,744.25 238.75,789.75 193.25,789.75 193.25,856.25 237.33,856.25 238.75,857.67
  pour cut-out: 133.25,1062.75 133.25,954.25 178.75,954.25 178.75,1002.75 193.25,1017.25 259.67,1017.25 259.67,1062.75
  pour cut-out: 744.22,1914.02 744.24,1914 891.03,1914 891.72,1913.32 891.72,1868.53 744.22,1868.53
  pour cut-out: 1159.75,1859.75 1159,1860.5 1159,1878 1152,1878 1146,1872 1147,1871 1147,1858 1158,1858
  pour cut-out: 1114.25,1814.25 1107.64,1814.25 1107.64,1833.64 1113,1839 1115,1837 1115,1818 1116,1817
  pour cut-out: 702,720 706,724 706.77,723.23 736,723.23 736,793 606,793 602,789 602,727.68 609.68,720
Multi-Layer:
  pour cut-out: 600,781 600,757 626,757 626,781
  pour cut-out: 1206.82,456.39 1206.82,427.65 1237.13,427.65 1237.53,428.05 1237.13,428.44 1237.13,456 1208,456 1207.21,456.79
  pour cut-out: 1169.26,436.06 1169.26,407.32 1199.57,407.32 1199.97,407.72 1199.57,408.11 1199.57,435.67 1170.44,435.67 1169.65,436.46

## Silkscreen, mask and mechanical layers (free items; w line width, h text height)
Top Overlay:
  region: 1292.52,1350.24 1292.52,1405.24 1272.52,1405.24 1272.52,1350.24 1242.52,1350.24 1242.52,1405.24 1222.52,1405.24 1222.52,1350.24 1197.52,1350.24 1197.52,1425.24 1212.52,1440.24 1302.52,1440.24 1317.52,1425.24 1317.52,1350.24
  region: 1337.52,1401.24 1337.52,1425.24 1351.52,1440.24 1432.52,1440.24 1447.52,1425.24 1447.52,1401.24 1426.52,1401.24 1426.52,1420.24 1361.52,1420.24 1361.52,1401.24
  region: 1337.52,1350.24 1337.52,1405.24 1447.52,1405.24 1447.52,1400.24 1432.52,1385.24 1362.52,1385.24 1362.52,1350.24
  region: 1382.52,1370.24 1532.52,1370.24 1532.52,1385.24 1482.52,1385.24 1467.52,1400.24 1467.52,1425.24 1482.52,1440.24 1557.52,1440.24 1563.52,1435.24 1563.52,1425.24 1558.52,1420.24 1492.52,1420.24 1492.52,1405.24 1547.52,1405.24 1562.52,1390.24 1562.52,1365.24 1547.52,1350.24 1382.52,1350.24
  lines w3: 656,721 723,721 747.5,696.5 ; 902,696 927,721 1003,721
  lines w4: 1563.52,1425.24 1558.52,1420.24 1492.52,1420.24 1492.52,1405.24 1547.52,1405.24 1562.52,1390.24 1562.52,1375.24 1562.52,1365.24 1547.52,1350.24 1382.52,1350.24 1382.52,1370.24 1532.52,1370.24 1532.52,1385.24 1482.52,1385.24 1467.52,1400.24 1467.52,1405.24 1467.52,1425.24 1482.52,1440.24 1558.52,1440.24 1563.52,1435.24 ; 1197.52,1350.24 1197.52,1425.24 1212.52,1440.24 1302.52,1440.24 1317.52,1425.24 1317.52,1350.24 1292.52,1350.24 1292.52,1405.24 1272.52,1405.24 1272.52,1350.24 1242.52,1350.24 1242.52,1405.24 1222.52,1405.24 1222.52,1350.24 1197.52,1350.24 ; 1337.52,1350.24 1362.52,1350.24 1362.52,1385.24 1432.52,1385.24 1447.52,1400.24 1447.52,1425.24 1432.52,1440.24 1352.52,1440.24 1337.52,1425.24 1337.52,1350.24 ; 1362.52,1405.24 1427.52,1405.24 1427.52,1420.24 1362.52,1420.24 1362.52,1405.24
  text "EVQ4242-VE-00B" at 1178,1295 h25
  text "Monolithic Power Systems" at 1182,1252 h25
  text "www.monolithicpower.com" at 1183,1205 h25
  text "GPIO2" at 1416,1022 h30
  text "SCL" at 136,1013 h30
  text "GND" at 135,914 h30
  text "GND" at 1463,912 h30
  text "SDA" at 142,818 h30
  text "EN" at 1494.41,812.34 h30
  text "GPIO1" at 139,720 h30
Bottom Overlay:
  text "DM" at 805,1679 h25
  text "DP" at 849,1579 h25
  text "CC1" at 1256,1555 h25
  text "CC2" at 1345,1522 h25

## Dimensions
0,0 to 1692.91,0 on Keep-Out Layer
1692.91,1968.5 to 1692.91,0 on Keep-Out Layer